# Altium PCB Cheater Dice.PcbDoc
Units mm, origin at the board's own origin, x right, y up, seen from the top; angles counter-clockwise.
Board outline 50.25 x 31.25 mm, 2 copper layers (Top Layer, Bottom Layer); 31 components, 24 nets, 90 pads, 35 vias.
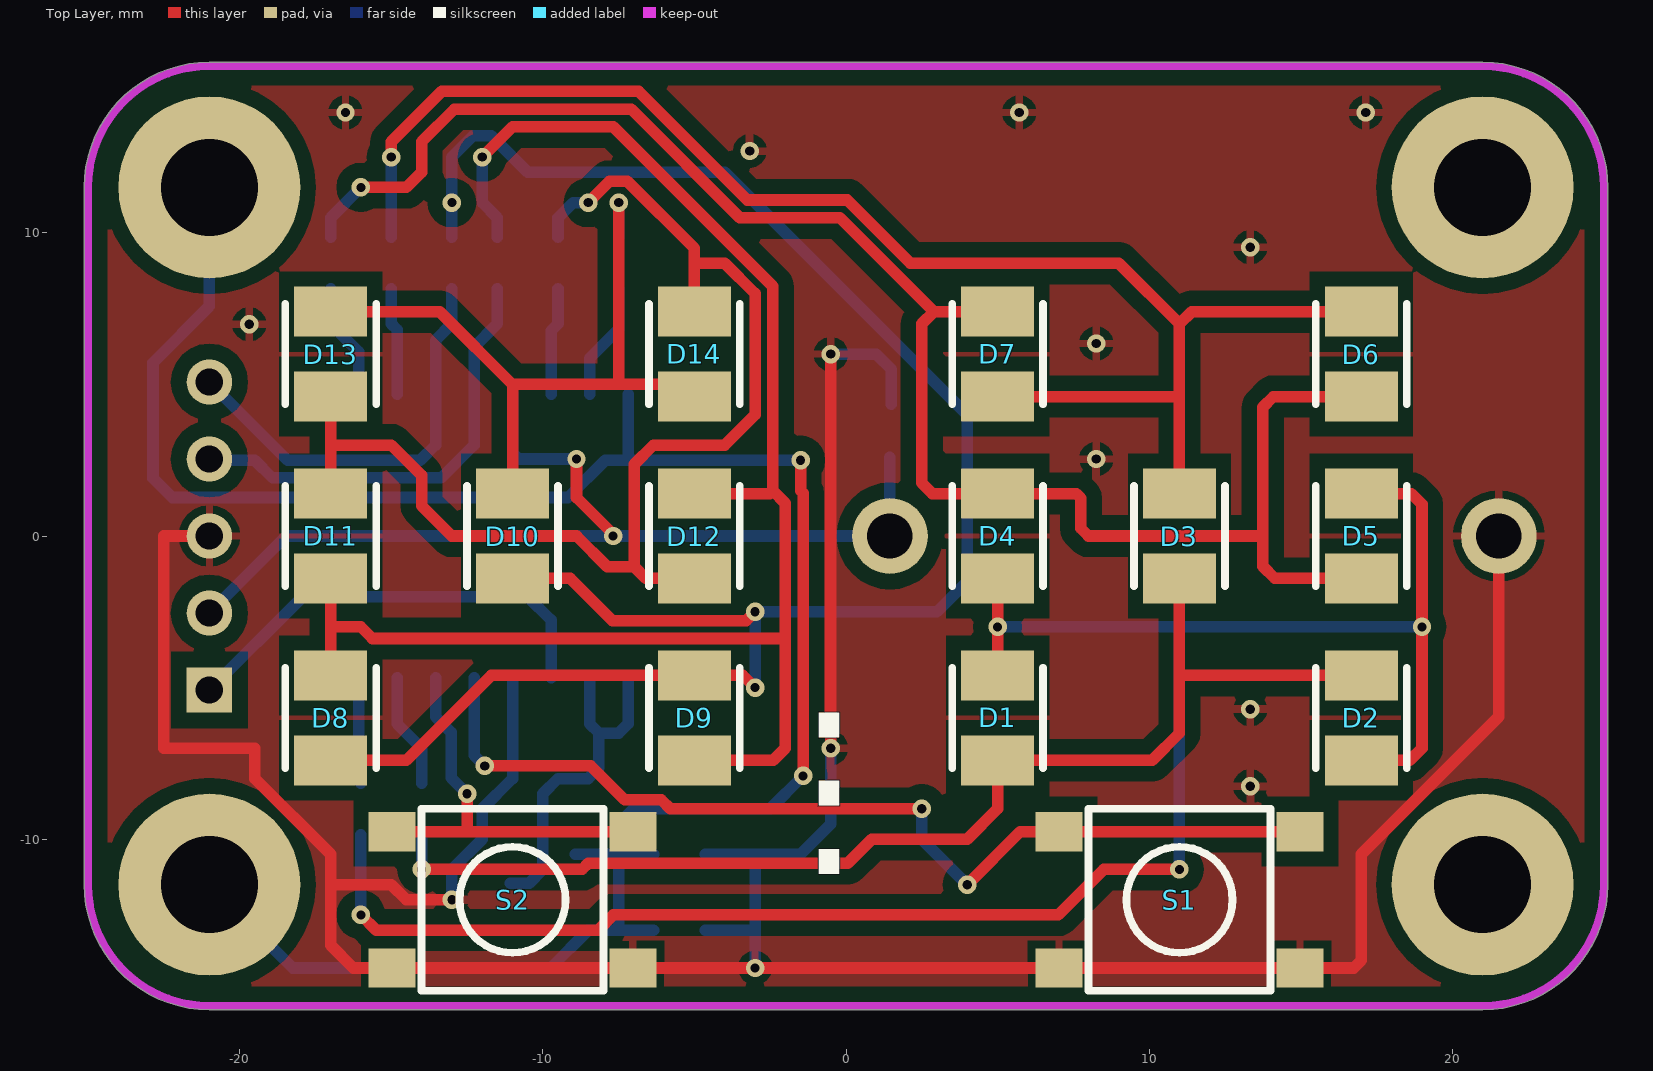
[diagram p0: Top Layer view]
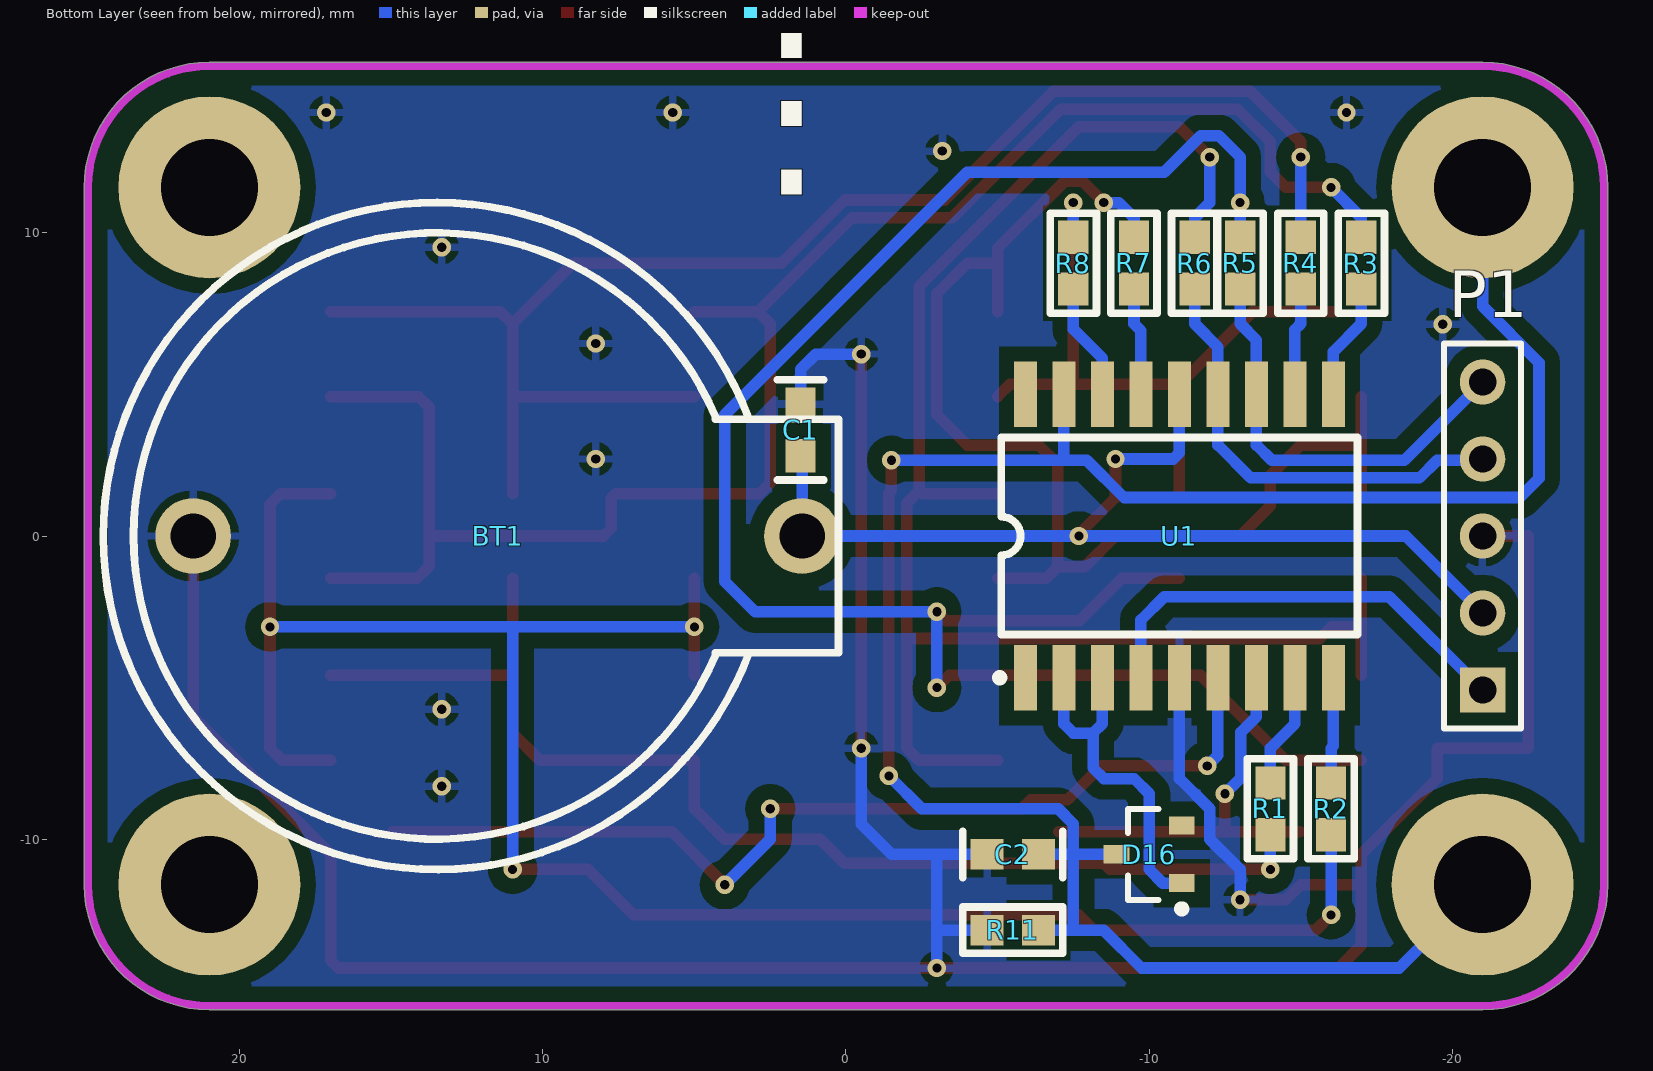
[diagram p1: Bottom Layer view, seen from below]

## Layer stack, top to bottom
Top Layer: signal copper 0.0356
Dielectric: dielectric 0.32, FR-4, Dk 4.8
Bottom Layer: signal copper 0.0356

## Board outline
25.127,11.5 25.127,-11.5 cw(c25,-11.5) 25.127,-11.501 cw(c21,-11.5) 21,-15.627 -21,-15.627 cw(c-21,-11.5) -25.127,-11.5 -25.127,11.5 cw(c-25,11.5) -25.127,11.501 ccw(c-21,11.5) -25.127,11.5 -25.127,11.501 cw(c-21,11.5) -21,15.627 21,15.627 cw(c21,11.5)

## Design rules (kind name [scope] priority, off if disabled: settings)
Clearance Poly_GND [inPolygon vs not innet (gnd)] p1: gap=0.508
Clearance [All] p2: gap=0.203
PasteMaskExpansion [All] p1: expansion=-0.15
PolygonConnect [All] p1: connectstyle=Relief reliefconductorwidth=0.254 reliefentries=4 polygonreliefangle="90 Angle" airgapwidth=0.254
RoutingVias [All] p1: holewidth=0.305 width=0.61 viastyle="Through Hole" minholewidth=0.305 minwidth=0.61 maxholewidth=0.711 maxwidth=1.27
SolderMaskExpansion [All] p1: expansion=0.102
Width Standard [All] p1: maxlimit=0.635 minlimit=0.203 preferedwidth=0.203
Width Power [inNet('VIN')] p2: maxlimit=2.54 minlimit=0.203 preferedwidth=0.635
27 further rules are at their usual default settings.

## Classes and differential pairs
component class "Cheater Dice": BT1
component class U_LEDS: D1 D2 D3 D4 D5 D6 D7 D8 D9 D10 D11 D12 D13 D14 R1 R2 R3 R4 R5 R6 R7 R8
component class U_PIC16F87: C1 C2 D16 P1 R11 S1 S2 U1

## Components (designator, comment, footprint, x,y, rotation, side; value= is the part's Value field where it differs from the comment)
BT1 "Battery" CR2032 13.5,0 r0 bottom
C1 "100nF" "CAP (3D) - 0603" 1.5,3.5 r90 bottom
C2 "330pF" "CAP (3D) - 0603" -5.5,-10.5 r180 bottom
D1 "LED (RED)" PLCC_2 5,-6 r270 top
D2 "LED (RED)" PLCC_2 17,-6 r270 top
D3 "LED (RED)" PLCC_2 11,0 r270 top
D4 "LED (RED)" PLCC_2 5,0 r270 top
D5 "LED (RED)" PLCC_2 17,0 r270 top
D6 "LED (RED)" PLCC_2 17,6 r270 top
D7 "LED (RED)" PLCC_2 5,6 r270 top
D8 "LED (RED)" PLCC_2 -17,-6 r270 top
D9 "LED (RED)" PLCC_2 -5,-6 r270 top
D10 "LED (RED)" PLCC_2 -11,0 r270 top
D11 "LED (RED)" PLCC_2 -17,0 r270 top
D12 "LED (RED)" PLCC_2 -5,0 r270 top
D13 "LED (RED)" PLCC_2 -17,6 r270 top
D14 "LED (RED)" PLCC_2 -5,6 r270 top
D16 "BAS16" SOT-23_L -10,-10.5 r0 bottom
P1 "Header 5" HDR1X5 -21,-5.08 r90 bottom
R1 "470R" "RES (3D) - 0603" -14,-9 r90 bottom
R2 "470R" "RES (3D) - 0603" -16,-9 r90 bottom
R3 "470R" "RES (3D) - 0603" -17,9 r270 bottom
R4 "470R" "RES (3D) - 0603" -15,9 r270 bottom
R5 "470R" "RES (3D) - 0603" -13,9 r270 bottom
R6 "470R" "RES (3D) - 0603" -11.5,9 r270 bottom
R7 "470R" "RES (3D) - 0603" -9.5,9 r270 bottom
R8 "470R" "RES (3D) - 0603" -7.5,9 r270 bottom
R11 "220K" "RES (3D) - 0603" -5.5,-13 r0 bottom
S1 "SWITCH" "TACT 6mm" 11,-12 r0 top
S2 "SWITCH" "TACT 6mm" -11,-12 r0 top
U1 "PIC16F648A" SOIC-18 -11,0 r180 bottom

## Footprints (in the part's own frame and the unit in brackets; to place one, negate y for a bottom-side part, rotate by r counter-clockwise, add the part's x,y. Pads: shape width x height; smd on the part's side, far side on the other; paste and mask are expansions set on the pad)
"CAP (3D) - 0603" [mm]
  rect 1.1x1 smd: 1(0.85,0) 2(-0.85,0)
  silkscreen extent -1.65,-0.76 1.65,0.76, body extent -0.8,-0.4 0.8,0.4, height 0.92
CR2032 [mm]
  round 2.5 hole 1.5: 1(-12.05,0) 2(8.035,0)
  silkscreen extent -13.25,-11 11,11
HDR1X5 [mm] "Connector; Header; 5 Position"
  rect 1.5x1.5 hole 0.9: 1(0,0)
  round 1.5 hole 0.9: 2(2.54,0) 3(5.08,0) 4(7.62,0) 5(10.16,0)
  silkscreen extent -1.27,-1.27 11.43,1.27
PLCC_2 [mm]
  rect 1.65x2.41 smd: 1(-1.4,0) 2(1.4,0)
  silkscreen extent -1.65,-1.5 1.65,1.5, body extent -1.85,-1.5 1.85,1.5, height 2.15
"RES (3D) - 0603" [mm]
  rect 1.1x1 smd: 1(0.85,0) 2(-0.85,0)
  silkscreen extent -1.65,-0.76 1.65,0.76, body extent -0.8,-0.4 0.8,0.4, height 0.92
SOIC-18 [mil]
  rect 30x85 smd: 1(-200,-184.05) 2(-150,-184.05) 3(-100,-184.05) 4(-50,-184.05) 5(0,-184.05) 6(50,-184.05) 7(100,-184.05) 8(150,-184.05) 9(200,-184.05) 10(200,184.06) 11(150,184.06) 12(100,184.06) 13(50,184.06) 14(0,184.06) 15(-50,184.06) 16(-100,184.06) 17(-150,184.06) 18(-200,184.06)
  silkscreen extent -238,-189 231,128, body extent -236,-148 236,148, height 100
SOT-23_L [mm] "SOT23, 3-Leads, Body 2.9x1.3mm, Pitch 0.95mm, Lead Span 2.5mm, IPC High Density"
  rect 0.85x0.6 smd: 1(-1.075,0.95) 2(-1.075,-0.95) 3(1.075,0)
  silkscreen extent -1.2,-1.5 0.7,1.92, body extent -0.7,-1.5 0.7,1.5, height 1.1
"TACT 6mm" [mm]
  rect 1.55x1.3 smd: 1(-3.975,-2.25) 1(3.975,-2.25) 2(-3.975,2.25) 2(3.975,2.25)
  silkscreen extent -3,-3 3,3, body extent -3,-3 3,3, height 5

## Part data
BT1: "Multicell Battery"
C1 C2: library part CAP, "CAPACITOR SMD 0402"
D1 D2 D3 D4 D5 D6 D7 D8 D9 D10 D11 D12 D13 D14: library part "LED 3mm RED", "3mm RED LED"
D16: library part "Diode BAS16", "Silicon Switching Diode for High-Speed Switching"
P1: "Header, 5-Pin"
R1 R2 R3 R4 R5 R6 R7 R8: library part "RES SMD 0603 590R", "RESISTOR SMD 0603 590R"
R11: library part RES, "ZERO OHM LINK"
S1 S2: library part "TACT SWITCH ALPS SKQMAQ", "Switch"
U1: library part PIC16F87/88, "PIC16F88"

## Free pads (board coordinates)
  round 6 hole 3.2: 0(-21,-11.5) 0(-21,11.5) 0(21,-11.5) 0(21,11.5)

## Via types
v1: diameter 0.61, hole 0.305, Top Layer to Bottom Layer, 35 vias

## Nets (pads, with @x,y where several pads share a name; then routed paths per layer and width w, separated by ;. In a path a pad name is that pad's centre, name@x,y a point inside that pad or via, vN(x,y) a via of type N, cw(c..) or ccw(c..) an arc to the next point about the centre after c; other vN are vias at no path point)
BUTTON_0: S1.2 U1.6 | length 32.9
  Top Layer w0.381: v1(-11.916,-7.584) -8.416,-7.584 -7.294,-8.706 -6.087,-8.706 -5.793,-9 v1(2.5,-9) ; v1(4,-11.5) 5.75,-9.75 7.025,-9.75 S1.2@14.975,-9.75
  Bottom Layer w0.381: U1.6 -12.27,-7.23 v1(-11.916,-7.584) ; v1(2.5,-9) 2.5,-10 v1(4,-11.5)
BUTTON_1: S2.2 U1.7 | length 13.5
  Top Layer w0.381: S2.2@-14.975,-9.75 -12.5,-9.75 ; v1(-12.5,-8.5) -12.5,-9.75 ; S2.2@-7.025,-9.75 -12.5,-9.75
  Bottom Layer w0.381: U1.7 -13.54,-5.96 -13.02,-6.48 -13.02,-7.98 v1(-12.5,-8.5)
COMP_OSC_OUT: D16.1 U1.2 U1.3 | length 11.7
  Bottom Layer w0.381: D16.1 -10.45,-11.45 -10,-11 -10,-8.5 -9.5,-8 -8.5,-8 -8.15,-7.65 -8.15,-6.5 ; U1.3 -8.46,-6.19 -8.15,-6.5 ; U1.2 -7.19,-6.19 -7.5,-6.5 -8.15,-6.5
GND: BT1.2 C1.1 C2.2 P1.3 R11.1 S1.1 S2.1 U1.5 | length 110.5
  Top Layer w0.381: P1.3 -22.5,0 -22.5,-7 -19.5,-7 -19.5,-8 -17,-10.5 -17,-11.5 ; v1(-13,-12) -14.5,-12 -15,-11.5 -17,-11.5 ; v1(-0.5,-7) v1(-0.5,6) ; BT1.2 21.535,-5.965 17,-10.5 17,-14 16.75,-14.25 14.975,-14.25 7.025,-14.25 v1(-3,-14.25) -7.025,-14.25 -14.975,-14.25 -16.25,-14.25 -17,-13.5 -17,-11.5
  Bottom Layer w0.381: v1(-13,-12) -13,-11 -12,-10 -12,-9 -11,-8 U1.5 ; R11.1 -3,-13 ; C2.2 -3,-10.5 ; v1(-3,-14.25) -3,-13 ; v1(-0.5,-7) -0.5,-9.5 -1.5,-10.5 -3,-10.5 ; v1(-0.5,6) 1,6 1.5,5.5 C1.1 ; -3,-13 -3,-10.5
  other v1: 13.335,-8.255 13.335,-5.715 8.255,2.54 8.255,6.35 -19.685,6.985 13.335,9.525 -3.175,12.7 -16.51,13.97 5.715,13.97 17.145,13.97
ICSP_VPP: P1.1 U1.4 | length 14.8
  Bottom Layer w0.381: P1.1 -17.92,-2 -10.5,-2 -9.73,-2.77 U1.4
LED_0: R1.1 U1.8 | length 3.8
  Bottom Layer w0.381: U1.8 -14.81,-6.19 -14,-7 R1.1
LED_1: R2.1 U1.9 | length 3.5
  Bottom Layer w0.381: U1.9 -16.08,-6.92 -16,-7 R2.1
LED_2: R3.1 U1.10 | length 3.9
  Bottom Layer w0.381: R3.1 -17,7 -16.08,6.08 U1.10
LED_3: R4.1 U1.11 | length 3.6
  Bottom Layer w0.381: R4.1 -15,7 -14.81,6.81 U1.11
LED_4: P1.5 R5.1 U1.12 | length 14.1
  Bottom Layer w0.381: P1.5 -18.42,2.5 -14.04,2.5 -13.54,3 U1.12 -13.54,6.46 -13,7 R5.1
LED_5: P1.4 R6.1 U1.13 | length 14.9
  Bottom Layer w0.381: P1.4 -20.96,2.5 -19.5,2.5 -18.916,1.916 -13.354,1.916 -12.27,3 U1.13 -12.27,6.23 -11.5,7 R6.1
NetC2_1: C2.1 D16.3 pad.0@-21,11.5 pad.0@-21,-11.5 R11.2 U1.17 | length 74.2
  Top Layer w0.381: v1(-1.5,2.5) -1.5,1.5 -1.416,1.416 v1(-1.416,-7.916)
  Bottom Layer w0.381: pad.0@-21,-11.5 -18.25,-14.25 -9.75,-14.25 -8.5,-13 -7.5,-13 ; pad.0@-21,11.5 -21,7.575 -22.86,5.715 -22.86,1.905 -22.225,1.27 -9.172,1.27 -7.942,2.5 -7.19,2.5 ; D16.3 -7.5,-10.5 ; U1.17 -7.19,2.5 ; R11.2 -7.5,-13 ; C2.1 -7.5,-10.5 ; v1(-1.5,2.5) -7.19,2.5 ; v1(-1.416,-7.916) -2.5,-9 -7,-9 -7.5,-9.5 -7.5,-10.5 ; -7.5,-13 -7.5,-10.5
NetD1_1: D1.1 D2.2 D4.2 D5.1 R2.2 | length 68.2
  Top Layer w0.381: v1(-16,-12.5) -15.5,-13 -8.174,-13 -7.674,-12.5 7,-12.5 8.5,-11 v1(11,-11) ; D1.1 v1(5,-3) D4.2 ; D2.2 18.6,-7.4 19,-7 v1(19,-3) 19,1.05 18.65,1.4 D5.1
  Bottom Layer w0.381: v1(-16,-12.5) R2.2 ; v1(5,-3) 11,-3 ; v1(11,-11) 11,-3 ; v1(19,-3) 11,-3
NetD1_2: D1.2 D2.1 D3.2 R1.2 | length 40.1
  Top Layer w0.381: v1(-14,-11) -8.706,-11 -8.5,-10.794 0.056,-10.794 0.85,-10 4,-10 5,-9 D1.2 10.1,-7.4 11,-6.5 11,-4.6 ; D3.2 11,-4.6 ; D2.1 11,-4.6
  Bottom Layer w0.381: v1(-14,-11) R1.2
NetD3_1: D3.1 D6.1 D7.2 R4.2 | length 50.7
  Top Layer w0.381: v1(-15,12.5) -15,13 -13.332,14.668 -6.842,14.668 -3.258,11.084 0.042,11.084 2.126,9 9,9 11,7 ; D7.2 10.9,4.6 ; D3.1 11,7 ; D6.1 11.4,7.4 11,7
  Bottom Layer w0.381: R4.2 v1(-15,12.5)
NetD4_1: D4.1 D5.2 D6.2 D7.1 R3.2 | length 57.9
  Top Layer w0.381: v1(-16,11.5) -14.5,11.5 -14,12 -14,13 -12.916,14.084 -7.084,14.084 -3.5,10.5 -0.2,10.5 2.9,7.4 ; D7.1 2.9,7.4 ; D5.2 14.15,-1.4 13.75,-1 13.75,0 ; D6.2 14.1,4.6 13.75,4.25 13.75,0 ; 2.9,7.4 2.5,7 2.5,1.75 2.85,1.4 D4.1 7.6,1.4 7.75,1.25 7.75,0.25 8,0 13.75,0
  Bottom Layer w0.381: R3.2 -17,10.5 v1(-16,11.5)
NetD8_1: D8.1 D9.2 D11.2 D12.1 R6.2 | length 54.6
  Top Layer w0.381: D8.1 -17,-3 ; D11.2 -17,-3 ; v1(-12,12.5) -11,13.5 -7.674,13.5 -2.416,8.242 -2.416,1.5 ; D9.2 -2.4,-7.4 -2,-7 -2,-3.5 ; D12.1 -2.516,1.4 -2.416,1.5 ; -17,-3 -16,-3 -15.619,-3.381 -2.119,-3.381 -2,-3.5 ; -2.416,1.5 -2,1.084 -2,-3.5
  Bottom Layer w0.381: v1(-12,12.5) -12,11 -11.5,10.5 R6.2
NetD8_2: D8.2 D9.1 D10.2 R5.2 | length 63.2
  Top Layer w0.381: D8.2 -14.5,-7.4 -11.7,-4.6 D9.1 -3.4,-4.6 v1(-3,-5) ; D10.2 -9.1,-1.4 -7.703,-2.797 -3.297,-2.797 v1(-3,-2.5)
  Bottom Layer w0.381: R5.2 v1(-13,11) -13,12.5 -12.301,13.199 -11.699,13.199 -10.5,12 -4,12 4,4 4,-1.5 3,-2.5 v1(-3,-2.5) v1(-3,-5)
NetD10_1: D10.1 D13.1 D14.2 R8.2 | length 23.1
  Top Layer w0.381: D13.1@-16.174,7.4 -13.4,7.4 -11,5 ; D10.1 -11,5 ; v1(-7.5,11) -7.5,5 ; D14.2 -5.4,5 -7.5,5 ; -11,5 -7.5,5
  Bottom Layer w0.381: R8.2 v1(-7.5,11)
NetD11_1: D11.1 D12.2 D13.2 D14.1 R7.2 | length 40.7
  Top Layer w0.381: D11.1 -17,3 ; D13.2 -17,3 ; v1(-8.5,11) -7.802,11.699 -7.211,11.699 -5,9.488 -5,9 ; D12.2 -6.601,-1.4 -6.985,-1.016 ; D14.1 -5,9 ; -17,3 -15,3 -14,2 -14,1 -13,0 -8.89,0 -7.874,-1.016 -6.985,-1.016 ; -6.985,-1.016 -6.985,2.365 -6.35,3 -4,3 -3,4 -3,8 -4,9 -5,9
  Bottom Layer w0.381: R7.2 -9.5,10.5 -9,11 v1(-8.5,11)
NetR7_1: R7.1 U1.15 | length 3.6
  Bottom Layer w0.381: U1.15 -9.73,6.77 -9.5,7 R7.1
NetR8_1: R8.1 U1.16 | length 3.9
  Bottom Layer w0.381: U1.16 -8.46,5.866 -7.5,6.826 R8.1
VCC: BT1.1 C1.2 P1.2 U1.14 | length 33.3
  Top Layer w0.381: v1(-8.89,2.54) -8.89,1.27 -7.683,0.063 v1(-7.683,0)
  Bottom Layer w0.381: P1.2 -18.46,0 v1(-7.683,0) BT1.1 C1.2@1.45,2.6 ; U1.14 -11,2.745 -10.795,2.54 v1(-8.89,2.54)
VCOMP: U1.1
pads on no net: D16.2 U1.18

## Polygon pours and split planes (outlines as drawn)
GND on Bottom Layer "GND" (solid, remove dead copper, pour order 4): 25.127,11.5 25.127,-11.5 cw(c25,-11.5) 25.127,-11.501 cw(c21,-11.5) 21,-15.627 -21,-15.627 cw(c-21,-11.5) -25.127,-11.5 -25.127,11.5 cw(c-25,11.5) -25.127,11.501 ccw(c-20.996,11.5) -25.127,11.5 -25.127,11.501 cw(c-21,11.5) -21,15.627 21,15.627 cw(c21,11.5)
GND on Top Layer "GND" (solid, remove dead copper, pour order 5): 25.127,11.5 25.127,-11.5 cw(c25,-11.5) 25.127,-11.501 cw(c21,-11.5) 21,-15.627 -21,-15.627 cw(c-21,-11.5) -25.127,-11.5 -25.127,11.5 cw(c-25,11.5) -25.127,11.501 ccw(c-20.996,11.5) -25.127,11.5 -25.127,11.501 cw(c-21,11.5) -21,15.627 21,15.627 cw(c21,11.5)

## Keep-outs
Keep-Out Layer:
  lines w0.254: -25,11.5 cw(c-21,11.5) -21,15.5 21,15.5 cw(c21,11.5) 25,11.5 25,-11.5 ; -25,11.5 -25,-11.5 ccw(c-21,-11.5) -21,-15.5 21,-15.5 ccw(c21,-11.5) 25,-11.5 ; -25,11.5 -25,11.5 ; 25,-11.5 25,-11.5

## Silkscreen, mask and mechanical layers (free items; w line width, h text height)
Top Overlay:
  text "⋮" at -3.849,-12.238 h8.89
Bottom Overlay:
  text "⋮" at 5.08,10.16 h8.89
Mechanical 1:
  lines w0.254: -25,11.5 cw(c-21,11.5) -21,15.5 21,15.5 cw(c21,11.5) 25,11.5 25,-11.5 ; -25,11.5 -25,-11.5 ccw(c-21,-11.5) -21,-15.5 21,-15.5 ccw(c21,-11.5) 25,-11.5 ; -25,11.5 -25,11.5 ; 25,-11.5 25,-11.5
Mechanical 4:
  lines w0.254: -35,-25.5 -25,-25.5 35,-25.5 35,25.5 -35,25.5 -35,15.5 -35,-15.5 -35,-25.5